# EAGLE board big_seven_control_v0.1 (EAGLE 7.6.0)
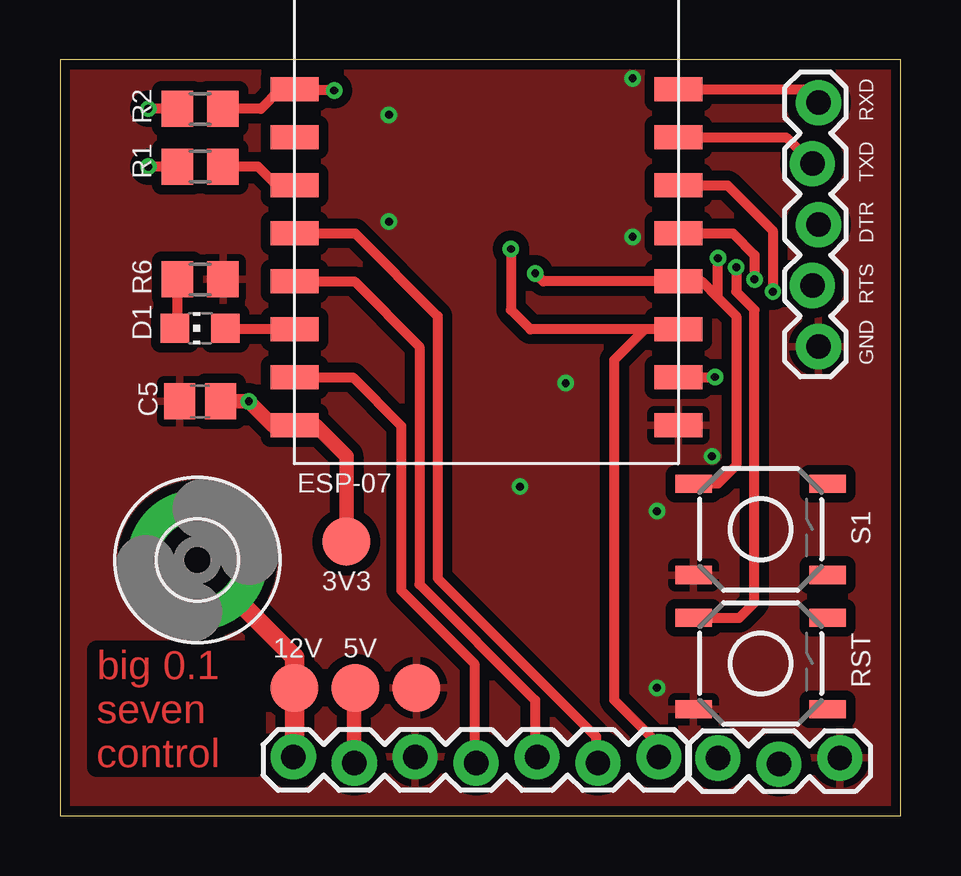
[diagram p0: board, top side]
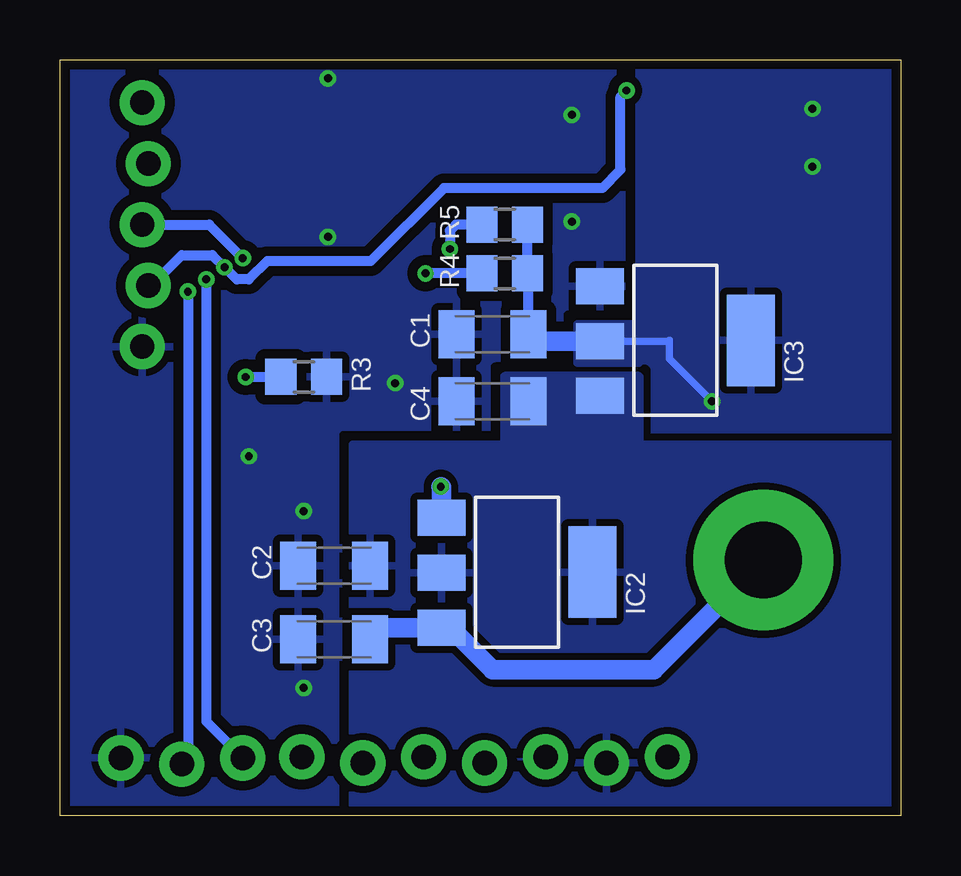
[diagram p1: board, bottom side, seen from below]

Size 35.05 x 31.5 mm. Coordinates in mm from the lower left corner, seen from the top.
Outline: 35.05,0 35.05,31.5 0,31.5 0,0 35.05,0
Copper layers (1*16): Top 0.0356mm / dielectric 1.5011mm / Bottom 0.0356mm
Design rules "default *": minimum track width 6mil, minimum drill 13mil, track to track 6mil, track to pad 6mil, pad to pad 6mil, via to via 6mil, smd to smd 6mil, copper to edge 15mil, drill to drill 6mil, minimum pad ring 7mil, minimum via ring 7mil, stop-mask expansion 3mil, vias tented up to drill 25mil, thermal gap 12mil

## Footprints (pad centres in the part's own frame; a part is rotated, then mirrored left to right if it is on the bottom)
C1206K = smd 1.5 x 2: 1 -1.5,0; 2 1.5,0
C0805 = smd 1.3 x 1.5: 1 -0.85,0; 2 0.85,0
CHIP-LED0805 = smd 1.2 x 1.2: A 0,-1.05; C 0,1.05
ESP-07 = smd 1 x 2: ADC -1.6,-8; CH_PD 0.4,-8; GND 10.4,8; GPIO0 4.4,8; GPIO2 6.4,8; GPIO4 0.4,8; GPIO5 2.4,8; GPIO12 6.4,-8; GPIO13 8.4,-8; GPIO14 4.4,-8; GPIO15 8.4,8; GPIO16 2.4,-8; REST -3.6,-8; RXD -1.6,8; TXD -3.6,8; VCC 10.4,-8
3,2-PAD = drill 3.2 pad 5.842: B3,2 0,0
SOT223 = smd 1.499 x 2.007: 1 -2.261,-3.15; 2 0.025,-3.15; 3 2.311,-3.15 | smd 3.81 x 2.007: 4 0,3.15
1X07_LOCK = drill 1.016 pad 1.88: 1 0,0.127; 2 2.54,-0.127; 3 5.08,0.127; 4 7.62,-0.127; 5 10.16,0.127; 6 12.7,-0.127; 7 15.24,0.127
1X03_LOCK = drill 1.016 pad 1.88: 1 0,0.127; 2 2.54,-0.127; 3 5.08,0.127
1X05_LOCK = drill 1.016 pad 1.88: 1 0,0.127; 2 2.54,-0.127; 3 5.08,0.127; 4 7.62,-0.127; 5 10.16,0.127
R0805 = smd 1.3 x 1.5: 1 -0.95,0; 2 0.95,0
TACTILE-SWITCH-SMD = smd 1.524 x 0.762: 1 -2.794,1.905; 2 2.794,1.905; 3 -2.794,-1.905; 4 2.794,-1.905
TP20R = smd 2 x 2: TP 0,0

## Placement (x,y rotation side)
C1  [C1206K]  17.02,20.07 180 bottom
C2  [C1206K]  23.62,10.41 180 bottom
C3  [C1206K]  23.62,7.37 180 bottom
C4  [C1206K]  17.02,17.27 180 bottom
C5  [C0805]  5.84,17.27 180 top
D1  [CHIP-LED0805]  5.84,20.32 90 top
ESP-07  ESP8266-07  [ESP-07]  17.78,26.67 270 top
H1  [3,2-PAD]  5.73,10.66 0 top
IC2  REG1117  [SOT223]  16,10.16 270 bottom
IC3  REG1117  [SOT223]  9.4,19.81 270 bottom
JP1  [1X07_LOCK]  9.73,2.33 0 top
JP3  [1X03_LOCK]  27.43,2.29 0 top
JP4  [1X05_LOCK]  31.5,29.72 270 top
R1  [R0805]  5.84,27.05 180 top
R2  [R0805]  5.84,29.46 180 top
R3  [R0805]  24.89,18.29 0 bottom
R4  [R0805]  16.51,22.61 0 bottom
R5  [R0805]  16.51,24.64 0 bottom
R6  [R0805]  5.84,22.35 0 top
RST  RST  [TACTILE-SWITCH-SMD]  29.21,6.35 0 top
S1  BOOT  [TACTILE-SWITCH-SMD]  29.21,11.94 0 top
TP1  12V  [TP20R]  9.78,5.33 0 top
TP2  delk  [TP20R]  14.86,5.33 0 top
TP3  5V  [TP20R]  12.32,5.33 0 top
TP4  3V3  [TP20R]  11.94,11.43 0 top

## Library data of the parts
C1-C5 = resistor
D1 = led
ESP-07 = lio
H1 = holes
IC2 IC3 = burr-brown; MPN: REG1117; OC_FARNELL: 1097566; OC_NEWARK: 14P6981
JP1 JP3 JP4 = SparkFun-Connectors
R1-R6 = rcl
RST S1 = SparkFun-Electromechanical; PROD_ID: SWCH-08247
TP1-TP4 = testpad

## Nets
+3V3: C1.1 C5.1 ESP-07.VCC IC3.2 IC3.4 R1.2 R2.2 R4.2 R5.2 TP4.TP
+5V: C2.1 C4.1 IC2.2 IC2.4 IC3.3 JP1.2 TP3.TP
+12V: C3.1 H1.B3,2 IC2.3 JP1.1 TP1.TP
ADC: ESP-07.ADC
CH_PD: ESP-07.CH_PD R1.1
GND: C1.2 C2.2 C3.2 C4.2 C5.2 ESP-07.GND IC2.1 IC3.1 JP1.3 JP3.3 JP4.5 R3.2 R6.2 RST.3 S1.3 TP2.TP
GPIO0: ESP-07.GPIO0 JP4.3 R4.1 S1.1
GPIO2: ESP-07.GPIO2 JP1.7 R5.1
GPIO4: ESP-07.GPIO4 JP3.2
GPIO5: ESP-07.GPIO5 JP3.1
GPIO12: D1.A ESP-07.GPIO12
GPIO13: ESP-07.GPIO13 JP1.4
GPIO14: ESP-07.GPIO14 JP1.5
GPIO15: ESP-07.GPIO15 R3.1
GPIO16: ESP-07.GPIO16 JP1.6
N$1: D1.C R6.1
RST: ESP-07.REST JP4.4 R2.1 RST.1
RXD: ESP-07.RXD JP4.2
TXD: ESP-07.TXD JP4.1

## Tracks (layer width: path | path; a pad name or v marks a point on that pad's centre or on a via)
+3V3  (via drill 0.33)
  Top 0.305: 10.67,16.26 9.65,16.26
  Top 0.406: R1.2 v3.68,27.05 | R2.2 v3.68,29.46
  Top 0.61: C5.1 v7.87,17.27 8.89,16.26 9.65,16.26 9.77,16.26 | 9.77,16.26 ESP-07.VCC | 9.77,16.26 10.67,16.26 11.94,14.99 TP4.TP
  Bottom 0.305: IC3.2 9.65,19.79 | 9.65,19.79 9.65,19.81 | 9.65,19.79 9.65,19.05 v7.87,17.27
  Bottom 0.406: C1.1 15.52,22.56 R4.2 R5.2
  Bottom 0.813: IC3.2 15.24,19.79 C1.1
  pour Bottom (isolate 0.305, rank 2): 0,15.49 10.92,15.49 10.92,31.5 0,31.5
  pour Bottom (rank 2, no thermals): 10.92,20.45 13.46,20.45 13.46,18.92 10.92,18.92
+5V
  Top 0.61: JP1.2 12.27,5.28 TP3.TP
  Bottom 0.813: 12.34,17.3 IC3.3 | 15.29,17.5 C4.1
  pour Bottom (isolate 0.305): 0,15.49 22.86,15.49 22.86,0 0,0
  pour Bottom (isolate 0.406, no thermals): 16.51,15.49 10.92,15.49 10.92,18.29 16.51,18.29
+12V
  Top 0.406: TP1.TP 9.73,5.33
  Top 0.813: H1.B3,2 9.78,6.6 TP1.TP 9.78,2.51 JP1.1
  Bottom 0.61: IC2.3 18.77,7.85
  Bottom 0.813: 5.83,10.66 H1.B3,2 10.29,6.1 17.02,6.1 18.77,7.85 | IC2.3 21.64,7.85 C3.1
CH_PD
  Top 0.406: ESP-07.CH_PD 9.76,26.29 9.02,26.29 8.26,27.05 R1.1
GND  (via drill 0.33)
  Bottom 0.813: IC2.1 19.15,13.69 v19.18,13.72
  other vias: 13.72,24.77 24.89,12.7 24.89,5.33 27.18,14.99 21.08,18.03 23.88,30.73 23.88,24.13 13.72,29.21
  pour Top (isolate 0.406): 0,31.5 35.05,31.5 35.07,0 0,0
  pour Bottom (isolate 0.406, rank 6): 35.05,31.5 0,31.5 0,0 35.05,0
GPIO0  (via drill 0.33)
  Top 0.406: v19.81,22.61 20.15,22.27 ESP-07.GPIO0 26.75,22.27 27.43,21.59 | 27.43,21.59 28.19,20.83 28.19,14.61 27.43,13.84 S1.1 | 27.43,21.59 v27.43,23.24
  Bottom 0.406: R4.1 v19.81,22.61 | JP4.3 28.83,24.64 v27.43,23.24
GPIO2  (via drill 0.33)
  Top 0.406: v18.8,23.62 18.8,21.08 19.61,20.27 24.38,20.27 | ESP-07.GPIO2 24.38,20.27 | JP1.7 24.97,2.97 23.11,4.83 23.11,19 24.38,20.27
  Bottom 0.406: R5.1 18.54,24.64 18.8,24.38 v18.8,23.62
GPIO4  (via drill 0.33)
  Top 0.406: ESP-07.GPIO4 27.83,26.27 29.72,24.38 v29.72,21.84
  Bottom 0.406: v29.72,21.84 29.72,2.41 JP3.2
GPIO5  (via drill 0.33)
  Top 0.406: ESP-07.GPIO5 28.05,24.27 28.96,23.37 v28.96,22.35
  Bottom 0.406: v28.96,22.35 28.96,3.94 JP3.1
GPIO12
  Top 0.406: ESP-07.GPIO12 6.94,20.27 D1.A
GPIO13
  Top 0.406: ESP-07.GPIO13 12.21,18.27 14.22,16.26 14.22,9.4 17.27,6.35 17.27,2.28 JP1.4
GPIO14
  Top 0.406: ESP-07.GPIO14 12.27,22.27 14.99,19.56 14.99,9.65 19.81,4.83 19.81,2.54 JP1.5
GPIO15  (via drill 0.33)
  Top 0.406: ESP-07.GPIO15 27.16,18.27 v27.3,18.29
  Bottom 0.406: v27.3,18.29 R3.1
GPIO16
  Top 0.406: ESP-07.GPIO16 12.31,24.27 15.75,20.83 15.75,9.91 22.35,3.3 22.35,2.28 JP1.6
N$1
  Top 0.406: R6.1 4.89,20.42 D1.C
RST  (via drill 0.33)
  Top 0.406: v11.43,30.23 9.74,30.23 | RST.1 28.32,8.26 28.96,8.89 28.96,21.08 28.19,21.84 v28.19,22.86 | 9.74,30.23 ESP-07.REST | 9.74,30.23 9.14,30.23 8.38,29.46 R2.1
  Bottom 0.406: v11.43,30.23 11.68,29.97 11.68,26.92 12.45,26.16 19.05,26.16 22.1,23.11 26.42,23.11 27.18,22.35 27.69,22.35 v28.19,22.86 28.7,23.37 29.97,23.37 31.24,22.1 JP4.4
RXD
  Top 0.406: ESP-07.RXD 30.28,28.27 JP4.2
TXD
  Top 0.406: ESP-07.TXD 31.07,30.27 JP4.1

## Text on the board
Top: big 0.1 / seven / control
tNames: RXD | TXD | DTR | RTS | GND
tStop: big 0.1 / seven / control